# EAGLE board TopPanelV3.1 (EAGLE 7.3.0)
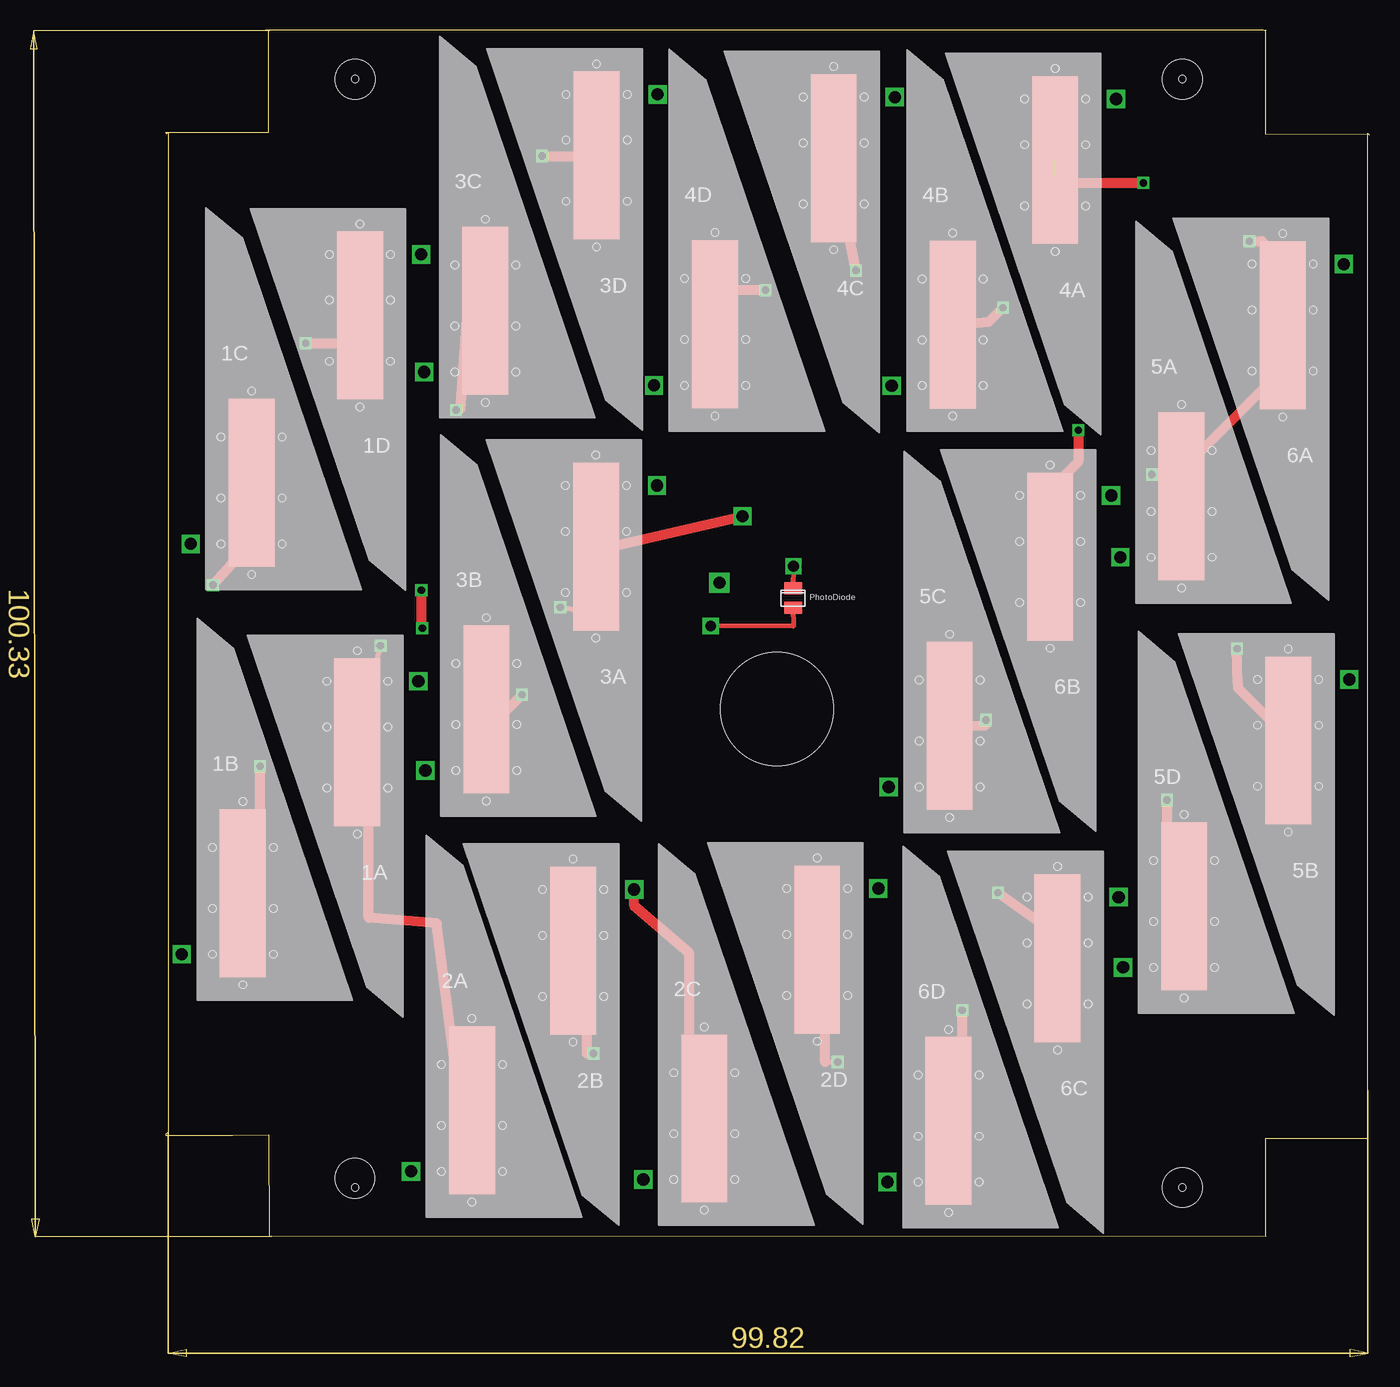
[diagram p0: board, top side]
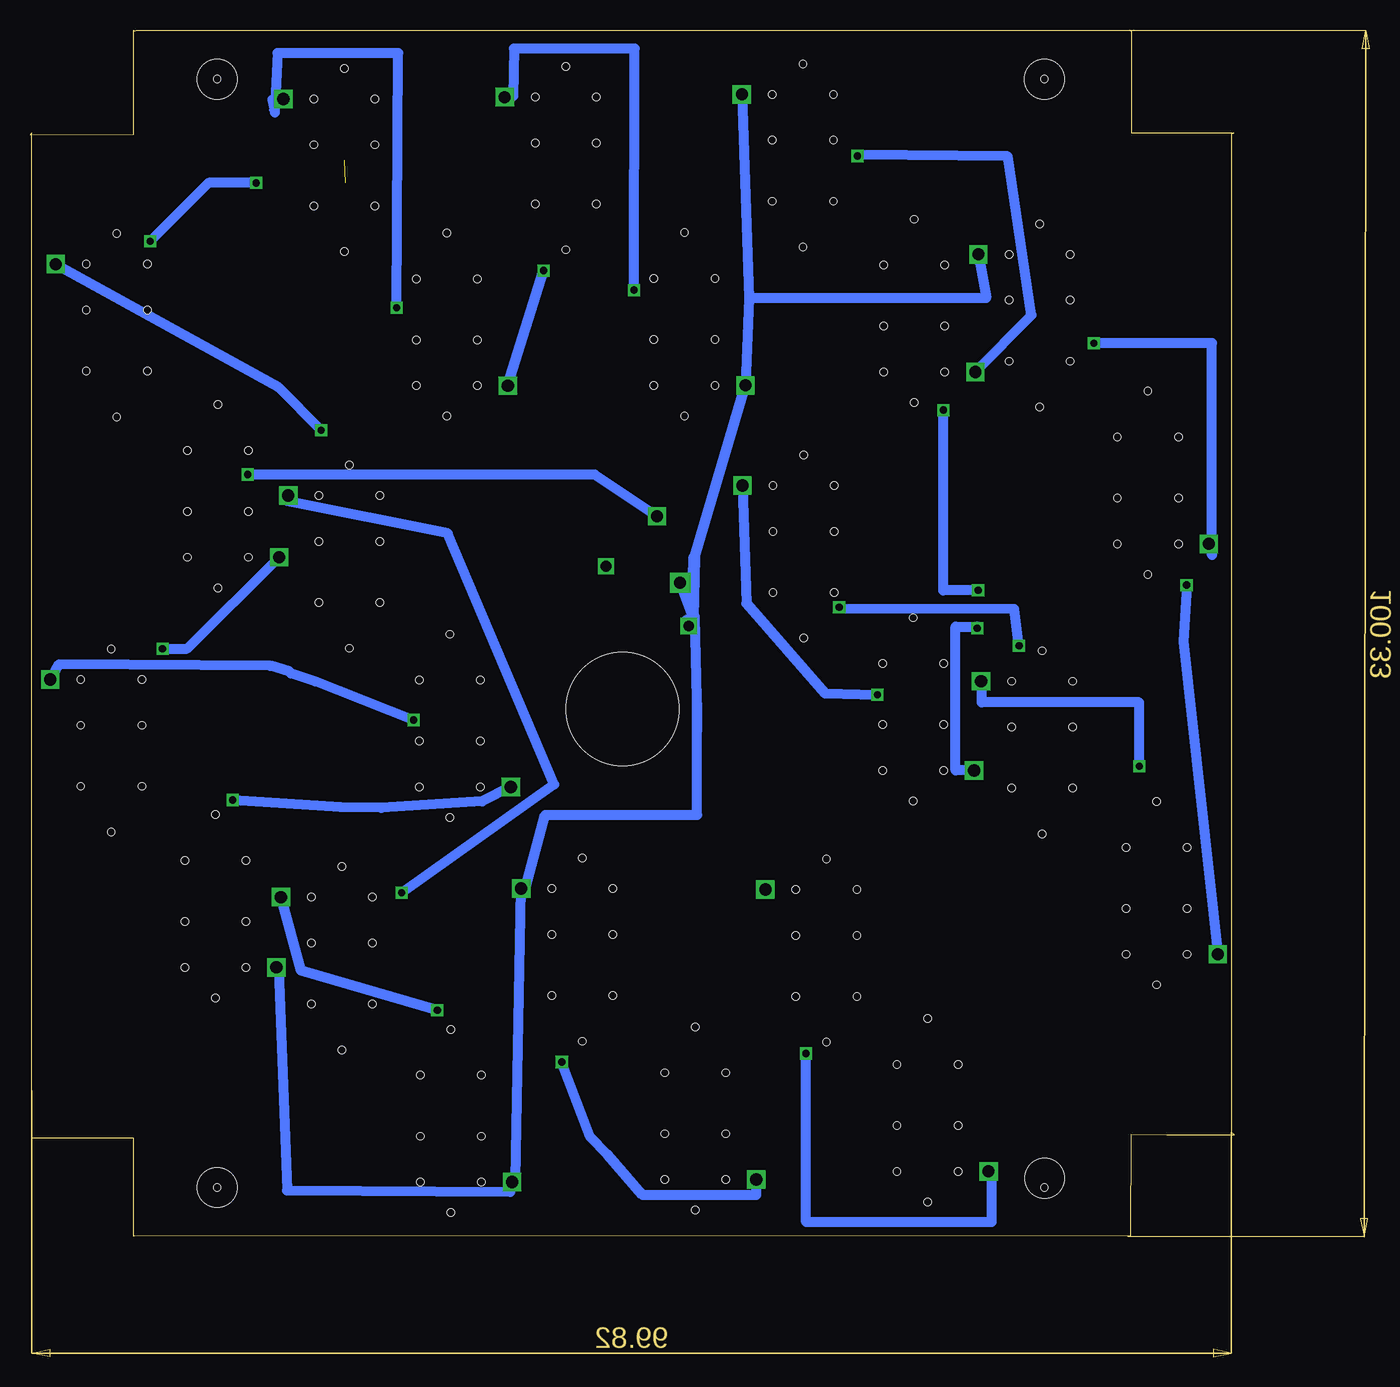
[diagram p1: board, bottom side, seen from below]

Size 100.18 x 100.35 mm. Coordinates in mm from the lower left corner, seen from the top.
Outline: 100.03,8.15 91.57,8.15 91.57,0 91.52,0.05 8.81,0 8.69,0 8.66,0.02 8.64,0.02 8.61,0 8.59,8.46 5.56,8.41 0.03,8.41 0,8.43 0,8.48 0.2,8.66 0.2,91.82 0.08,91.72 0.08,91.75 0.03,91.8 8.53,91.81 8.52,100.32 8.56,100.28 8.61,100.28 8.33,100.33 91.36,100.33 91.41,100.28 91.49,100.28 91.56,100.34 91.57,91.66 100.18,91.62
Outline: 100.03,8.15 100.03,8.15
Outline: 100.03,8.15 100.03,91.75 100.18,91.62
Outline: 100.18,91.62 100.18,91.62
Copper layers (1*16): Top 0.035mm / dielectric 1.5mm / Bottom 0.035mm
Design rules "default *": minimum track width 40mil, minimum drill 24mil, track to track 2mil, track to pad 2mil, pad to pad 8mil, via to via 8mil, smd to smd 8mil, copper to edge 40mil, drill to drill 8mil, minimum pad ring 10mil, minimum via ring 8mil, stop-mask expansion 4mil, vias tented up to drill 0mil, thermal gap 10mil
Holes 0.6 mm at 15.77,96.27 84.61,96.27 15.77,4.06 84.61,4.06
Holes 3.3 mm at 15.75,4.85 84.61,4.06 84.61,96.27 15.77,96.27
Holes 9.4 mm at 50.88,43.87

## Footprints (pad centres in the part's own frame; a part is rotated, then mirrored left to right if it is on the bottom)
SOLARCELL = smd 3.81 x 13.97: ANODE 5.08,10.16 | drill 1.016 square: CATHODE 0,5.08 | hole 0.6: 7.62,5.08; 5.08,2.54; 7.62,8.89; 5.08,17.78; 2.54,13.97; 2.54,8.89; 7.62,13.97; 2.54,5.08
PHOTODECTORDEVICE2 = smd 1 x 1.45: GND 0.76,0.4; PWROUT -0.88,0.4

## Placement (x,y rotation side)
1A  SOLARCELL  [SOLARCELL]  21.03,51.26 180 top
1B  SOLARCELL  [SOLARCELL]  1.35,18.39 0 top
1C  SOLARCELL  [SOLARCELL]  2.08,52.53 0 top
1D  SOLARCELL  [SOLARCELL]  21.26,86.77 180 top
2A  SOLARCELL  [SOLARCELL]  20.42,0.33 0 top
2B  SOLARCELL  [SOLARCELL]  38.99,33.93 180 top
2C  SOLARCELL  [SOLARCELL]  39.75,-0.36 0 top
2D  SOLARCELL  [SOLARCELL]  59.31,34.01 180 top
3A  SOLARCELL  [SOLARCELL]  40.89,67.54 180 top
3B  SOLARCELL  [SOLARCELL]  21.62,33.68 0 top
3C  SOLARCELL  [SOLARCELL]  21.51,66.83 0 top
3D  SOLARCELL  [SOLARCELL]  40.94,100.08 180 top
4A  SOLARCELL  [SOLARCELL]  79.1,99.69 180 top
4B  SOLARCELL  [SOLARCELL]  60.43,65.68 0 top
4C  SOLARCELL  [SOLARCELL]  60.68,99.85 180 top
4D  SOLARCELL  [SOLARCELL]  40.64,65.71 0 top
5A  SOLARCELL  [SOLARCELL]  79.45,51.41 0 top
5B  SOLARCELL  [SOLARCELL]  98.5,51.41 180 top
5C  SOLARCELL  [SOLARCELL]  60.17,32.31 0 top
5D  SOLARCELL  [SOLARCELL]  79.68,17.3 0 top
6A  SOLARCELL  [SOLARCELL]  98.04,85.95 180 top
6B  SOLARCELL  [SOLARCELL]  78.69,66.7 180 top
6C  SOLARCELL  [SOLARCELL]  79.3,33.3 180 top
6D  SOLARCELL  [SOLARCELL]  60.07,-0.56 0 top
U$1  PHOTODETECTOR  [PHOTODECTORDEVICE2]  51.82,53.04 270 top

## Library data of the parts
1A 1B 1C 1D 2A 2B 2C 2D 3A 3B 3C 3D 4A 4B 4C 4D 5A 5B 5C 5D 6A 6B 6C 6D = SolarCellTASCMirror
U$1 = solarcellnew

## Nets
GND: 1D.CATHODE 2D.CATHODE 3D.CATHODE 4D.CATHODE 5D.CATHODE 6D.CATHODE U$1.GND
N$1: 1A.CATHODE 1B.ANODE
N$2: 1C.CATHODE 1D.ANODE
N$3: 2A.CATHODE 2B.ANODE
N$4: 2C.CATHODE 2D.ANODE
N$5: 3C.CATHODE 3D.ANODE
N$6: 4A.CATHODE 4B.ANODE
N$7: 4C.CATHODE 4D.ANODE
N$8: 5A.CATHODE 5B.ANODE
N$9: 5C.CATHODE 5D.ANODE
N$10: 6A.CATHODE 6B.ANODE
N$11: 6C.CATHODE 6D.ANODE
N$12: 1B.CATHODE 1C.ANODE
N$13: 2B.CATHODE 2C.ANODE
N$14: 3A.CATHODE 3B.ANODE
N$15: 3B.CATHODE 3C.ANODE
N$16: 4B.CATHODE 4C.ANODE
N$17: 5B.CATHODE 5C.ANODE
N$18: 6B.CATHODE 6C.ANODE
PANELOUT: 1A.ANODE 2A.ANODE 3A.ANODE 4A.ANODE 5A.ANODE 6A.ANODE
PDOUT: U$1.PWROUT

## Tracks (layer width: path | path; a pad name or v marks a point on that pad's centre or on a via)
GND  (via drill 0.9, 1 pad 1.68)
  Top 0.406: U$1.GND 52.25,50.77 v45.36,50.77
  Bottom 0.406: 44.86,51.56 44.68,51.31 44.96,51.31 45.26,51.31 45.01,51.51 | 44.65,44.04 44.68,44.04 44.68,44.09 | 44.68,44.09 44.65,44.09 | 44.65,44.09 44.55,44.09 44.55,44.55 44.58,44.55 44.58,45.11 44.65,45.11 44.65,44.09 | 44.68,44.09 44.78,44.3 44.78,43.92 | 6D.CATHODE 59.84,4.85 59.79,4.72 | 5D.CATHODE 79.5,22.25 | v45.36,50.77 45.08,51.1 45.55,51.2
  Bottom 0.813: 44.65,42.06 44.65,44.04 44.69,44.7 | 44.69,44.7 44.86,51.56 | 3D.CATHODE 40.34,78.05 | 40.34,78.05 4D.CATHODE 44.91,56.44 | 59.79,4.72 2D.CATHODE 58.93,28.98 57.3,35.05 44.66,35.05 44.69,44.7 | 79.5,22.25 78.79,3.83 60.22,3.71 59.84,4.85 | 1D.CATHODE 20.6,78.05 40.34,78.05 | 45.01,51.51 v46.08,54.38
  Bottom 1.016: 45.06,51.46 45.01,51.51 44.91,56.44 | 44.96,51.31 45.55,51.2
N$1  (via drill 0.6)
  Top 0.406: 1B.ANODE 7.87,27.76
  Top 0.813: 7.87,27.76 v7.87,39.12
  Bottom 0.813: v7.87,39.12 7.87,44.42 20.98,44.42 20.98,46.28 1A.CATHODE
N$2  (via drill 0.6)
  Top 0.406: 15.52,74.3 1D.ANODE
  Top 0.813: v11.66,74.3 15.52,74.3
  Bottom 0.406: 1C.CATHODE 1.83,56.67
  Bottom 0.813: 1.83,56.67 1.83,74.3 v11.66,74.3
N$3  (via drill 0.6)
  Top 0.406: v35.61,15.22 35.05,15.22 | 35.05,23.62 33.91,23.62 2B.ANODE
  Top 0.813: 35.05,15.22 35.05,23.62
  Bottom 0.406: 2A.CATHODE 20.17,5.08
  Bottom 0.813: 20.17,5.08 20.17,1.19 35.61,1.19 v35.61,15.22
N$4  (via drill 0.6)
  Top 0.406: v55.93,14.5 54.89,14.5 | 54.89,21.82 53.82,21.82 2D.ANODE
  Top 0.813: 54.89,14.5 54.89,21.82
  Bottom 0.813: v55.93,14.5 53.57,8.28 52.12,6.81 49.2,3.43 39.75,3.43 2C.CATHODE
N$5  (via drill 0.6)
  Top 0.406: 35.2,89.86 3D.ANODE
  Top 0.813: v31.32,89.86 35.2,89.86
  Bottom 0.406: 31.32,89.99 v31.32,89.86
  Bottom 0.813: 3C.CATHODE 16.84,76.63 18.82,89.84 31.32,89.99
N$6  (via drill 0.6)
  Top 0.813: 4B.ANODE 68.53,76.1 v69.67,77.24
  Bottom 0.406: 79.81,93.47 80.09,93.67
  Bottom 0.7: 79.81,93.47 80.09,94.59 4A.CATHODE
  Bottom 0.813: v69.67,77.24 69.55,98.42 79.58,98.42 79.81,93.47
N$7  (via drill 0.6)
  Top 0.406: 47.5,78.72 4D.ANODE
  Top 0.813: v49.91,78.72 47.5,78.72
  Bottom 0.813: v49.91,78.72 49.86,98.81 59.92,98.81 59.97,94.84 4C.CATHODE
N$8  (via drill 0.6)
  Top 0.406: 5B.ANODE 93.65,40.79 93.88,40.56 93.88,41 | 89.23,45.64 89.23,45.92
  Top 0.813: 93.88,41 89.23,45.64 | 89.23,45.92 v89.15,48.87
  Bottom 0.813: v89.15,48.87 87.12,48.89 5A.CATHODE
N$9  (via drill 0.6)
  Top 0.406: 83.36,26.82 84.84,26.82 5D.ANODE
  Top 0.813: v83.31,36.3 83.36,26.82
  Bottom 0.406: 83.31,36.5 v83.31,36.3
  Bottom 0.813: 5C.CATHODE 62.56,36.19 70.94,35.64 74.35,35.71 v83.31,36.3
N$10  (via drill 0.6)
  Top 0.406: 72.97,61.47 72.97,57.71 6B.ANODE
  Top 0.813: v75.95,67.06 75.95,64.44 72.97,61.47
  Bottom 0.813: 6A.CATHODE 79.55,70.66 v75.95,67.06
N$11  (via drill 0.6)
  Top 0.406: 6D.ANODE 66.27,9.83
  Top 0.813: 66.27,9.83 v66.29,18.82
  Bottom 0.813: v66.29,18.82 77.62,22.1 6C.CATHODE
N$12  (via drill 0.6)
  Top 0.406: 1C.ANODE 6.5,61.59 5.74,61.59 5.74,56.34 5.97,56.41
  Top 0.813: 5.97,56.41 v3.94,54.18
  Bottom 0.813: v3.94,54.18 4.19,49.48 1B.CATHODE
N$13
  Top 0.406: 2C.ANODE 43.59,6.27
  Top 0.813: 43.59,6.27 43.59,23.55 38.99,27.48 2B.CATHODE
N$14  (via drill 0.6)
  Top 0.406: 28.45,43.84 3B.ANODE
  Top 0.813: v29.67,45.06 28.45,43.84
  Bottom 0.813: 3A.CATHODE 40.56,52.65 34.01,45.16 v29.67,45.06
N$15  (via drill 0.6)
  Top 0.406: v21.36,50.6 21.29,50.6 | 25.07,76.3 26.21,76.3 3C.ANODE
  Top 0.813: 21.29,50.6 v21.29,53.75 | v24.18,68.73 24.54,68.81 25.07,76.3
  Bottom 0.406: 21.36,50.72 v21.36,50.6
  Bottom 0.813: 3B.CATHODE 23.16,38.76 23.16,50.72 21.36,50.72 | v21.29,53.75 24.18,53.75 v24.18,68.73
N$16  (via drill 0.6)
  Top 0.813: v57.45,80.34 4C.ANODE
  Bottom 0.813: 4B.CATHODE v57.45,80.34
N$17  (via drill 0.6)
  Top 0.406: 68.25,42.52 v68.25,42.95
  Top 0.813: 5C.ANODE 68.25,42.52
  Bottom 0.406: 78.46,46.84 78.64,47.02
  Bottom 0.813: v68.25,42.95 76.45,46.18 78.46,46.84 | 78.64,47.02 80.16,47.45 97.79,47.57 5B.CATHODE
N$18  (via drill 0.6)
  Top 0.406: 6C.ANODE 74.7,25.2
  Top 0.813: 74.7,25.2 74.7,25.55 72.69,26.14 v69.27,28.58
  Bottom 0.813: v69.27,28.58 56.57,37.59 65.43,58.47 78.77,61.16 6B.CATHODE
PANELOUT  (via drill 0.6, 1)  (1 unrouted)
  Top 0.406: 2A.ANODE 24.69,9.75 | 16.92,41.07 15.93,41.07 1A.ANODE v17.88,49.12 | v32.84,52.32 35.56,51.94 3A.ANODE 35.92,57.1 | 5A.ANODE 84.86,63.86 84.86,64.01 | 93.07,72.21 93.02,72.28 | 93.02,72.28 92.02,73.74 | 92.1,81.89 92.49,81.53 93.02,81.53 93.02,75.79 | 6A.ANODE 93.02,75.79 | 93.02,75.79 93.02,72.28
  Top 0.813: 24.69,9.75 22.56,26.03 16.92,26.49 16.92,41.07 | 84.86,64.01 93.07,72.21 | 35.92,57.1 v48.01,59.89 | v82.07,63.37 82.63,63.42 84.86,63.86 | 73.91,87.63 v81.36,87.63 | v90.17,82.78 91.24,82.78 92.49,81.53
  Bottom 0.406: 32.79,52.22 v32.84,52.32
  Bottom 0.813: v17.88,49.12 18.29,52.17 32.79,52.22 | v48.01,59.89 53.19,63.37 v82.07,63.37 | v81.36,87.63 85.32,87.63 v90.17,82.78
PDOUT  (via drill 0.9)
  Top 0.406: v52.25,55.75 U$1.PWROUT

## Text on the board
tPlace: PhotoDiode
Document: TOP PANEL TASC / V 3.0 | PWR | PDOut | GND